# Altium PCB rota.PcbDoc
Units mil, origin at the board's own origin, x right, y up, seen from the top; angles counter-clockwise.
Board outline 6000 x 4000 mil, 2 copper layers (Top Layer, Bottom Layer); 10 components, 13 nets, 60 pads, 37 vias.
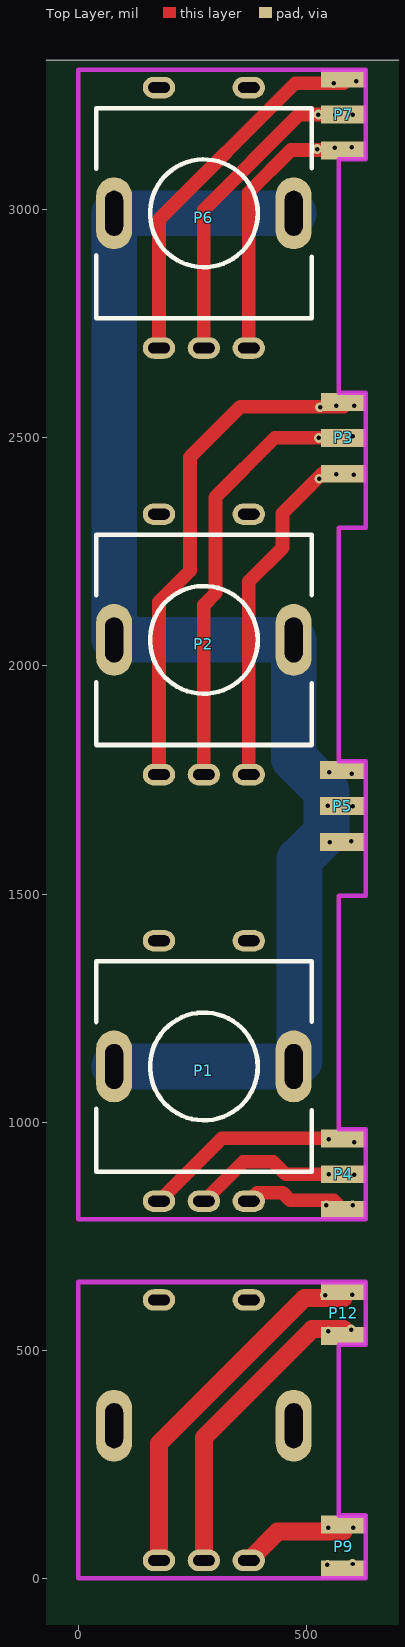
[diagram p0: Top Layer view]
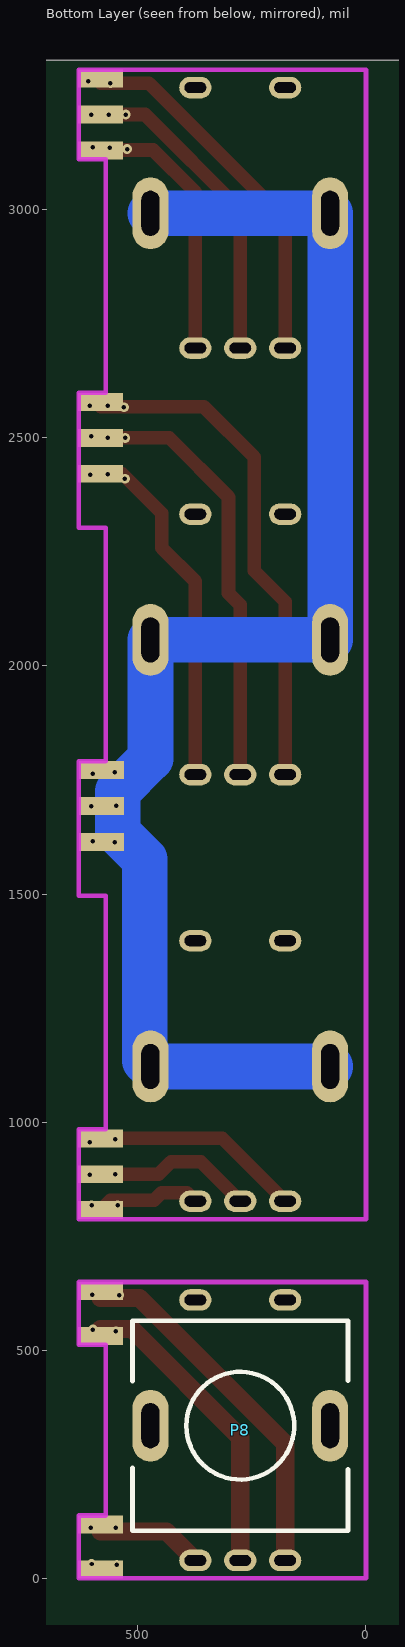
[diagram p1: Bottom Layer view, seen from below]

## Layer stack, top to bottom
Top Layer: signal copper 1.4
Dielectric: dielectric 12.6, FR-4, Dk 4.8
Bottom Layer: signal copper 1.4

## Board outline
-2135,-672.6 3865,-672.6 3865,3327.4 -2135,3327.4

## Design rules (kind name [scope] priority, off if disabled: settings)
Clearance [All] p1: gap=10
ComponentClearance [All] p1 off: gap=10 collisioncheckmode=3 verticalgap=10 showdistances=FALSE
Height [All] p1 off: minheight=0 maxheight=1000 prefheight=500
PolygonConnect [All] p1: connectstyle=Relief reliefconductorwidth=10 reliefentries=4 polygonreliefangle="90 Angle" airgapwidth=10
RoutingVias [All] p1: holewidth=9.84 width=21.65 viastyle="Through Hole" minholewidth=9.84 minwidth=21.65 maxholewidth=28 maxwidth=50
SolderMaskExpansion [All] p1: expansion=4
Width [All] p1: maxlimit=200 minlimit=10 preferedwidth=10 minimp=50.000000 maximp=50.000000 favimp=50.000000
26 further rules are at their usual default settings.

## Components (designator, comment, footprint, x,y, rotation, side; value= is the part's Value field where it differs from the comment)
P1 "ROTA" rotation_key 275.59,1122.05 r0 top locked
P2 "ROTA" rotation_key 275.59,2057.09 r0 top locked
P3 "Header 3" ROTA-3PIN 580.71,2500 r180 top
P4 "Header 3" ROTA-3PIN 580.71,885.83 r180 top
P5 "Header 3" ROTA-3PIN 580.71,1692.91 r0 top
P6 "ROTA" rotation_key 275.59,2992.13 r0 top locked
P7 "Header 3" ROTA-3PIN 580.71,3208.66 r180 top
P8 "ROTA" rotation_key 275.59,334.65 r180 bottom locked
P9 "Header 2" ROTA-2PIN 581.69,118.11 r0 top
P12 "Header 2" ROTA-2PIN 581.69,629.92 r0 top

## Footprints (in the part's own frame and the unit in brackets; to place one, negate y for a bottom-side part, rotate by r counter-clockwise, add the part's x,y. Pads: shape width x height; smd on the part's side, far side on the other; paste and mask are expansions set on the pad)
ROTA-2PIN [mm]
  rect 2.5x1 smd: 1(0,0) 2(0,-2.5)
  rect 2.5x1 smd far side: 1(0,0) 2(0,-2.5)
ROTA-3PIN [mm]
  rect 2.5x1 smd: 1(-0.025,2) 2(-0.025,0) 3(-0.025,-2)
  rect 2.5x1 smd far side: 1(-0.025,2) 2(-0.025,0) 3(-0.025,-2)
rotation_key [mm]
  oval 2x4 hole 1 slot 2.5 at 90 deg: 1(-5,0) 2(5,0)
  oval 1.8x1.2 hole 0.6 slot 1.2 at 0 deg: 3(-2.5,-7.5) 4(0,-7.5) 5(2.5,-7.5) 6(2.5,7) 7(-2.5,7)
  silkscreen extent -6,-5.85 6,5.85

## Part data
P1 P2 P6 P8: library part "Header 7", "Header, 7-Pin"
P3 P4 P5 P7: "Header, 3-Pin"
P9 P12: "Header, 2-Pin"

## Via types
v1: diameter 21.65, hole 9.84, Top Layer to Bottom Layer, 37 vias

## Nets (pads, with @x,y where several pads share a name; then routed paths per layer and width w, separated by ;. In a path a pad name is that pad's centre, name@x,y a point inside that pad or via, vN(x,y) a via of type N, cw(c..) or ccw(c..) an arc to the next point about the centre after c; other vN are vias at no path point)
GND: P1.1 P1.2 P2.1 P2.2 P5.1 P5.2 P5.3 P6.1 P6.2 | length 3110.7
  Bottom Layer w100: P1.1 P1.2 485.24,1134.84 485.24,1575.79 544.29,1634.84 544.29,1725.39 472.44,1797.24 P2.2 P2.1 P6.1 P6.2
  other v1: 551.18,1613.19 598.43,1616.14 547.24,1693.9 602.36,1692.91 599.41,1763.78 550.2,1766.73
NetP1_3: P1.3 P4.3 | length 461.6
  Top Layer w30: P1.3 314.96,964.57 P4.3@581.69,964.57
  other v1: 605.32,955.71 549.21,962.6
NetP1_4: P1.4 P4.2 | length 353.4
  Top Layer w30: P1.4 362.2,913.39 427.17,913.39 454.72,885.83 P4.2@581.69,885.83
  other v1: 605.32,884.84 549.21,885.83
NetP1_5: P1.5 P4.1 | length 231.3
  Top Layer w30: P1.5 392.72,845.47 447.83,845.47 464.57,828.74 560.04,828.74 P4.1@581.69,807.09
  other v1: 544.29,817.91 601.38,817.91
NetP2_3: P2.3 P3.3 | length 1106.5
  Top Layer w30: P2.3 177.17,2140.75 245.08,2208.66 245.08,2457.68 355.83,2568.43 P3.3@581.69,2568.43
  other v1: 530.51,2566.93 565.94,2569.88 605.32,2569.88
NetP2_4: P2.4 P3.2 | length 953.2
  Top Layer w30: P2.4 275.59,2133.86 301.18,2159.45 301.18,2370.08 431.1,2500 P3.2@581.69,2500
  other v1: 527.56,2500 565.94,2500 602.36,2502.95
NetP2_5: P2.5 P3.1 | length 773.1
  Top Layer w30: P2.5 374.02,2185.04 447.83,2258.86 447.83,2334.65 534.45,2421.26 P3.1@581.69,2421.26
  other v1: 528.54,2410.43 604.33,2419.29 565.94,2420.28
NetP6_3: P6.3 P7.3 | length 809.8
  Top Layer w30: P6.3 177.17,2978.35 475.91,3277.09 P7.3@581.69,3277.09
  other v1: 560.04,3277.56 609.25,3281.5
NetP6_4: P6.4 P7.2 | length 695.7
  Top Layer w30: P6.4 275.59,3000 484.25,3208.66 P7.2@581.69,3208.66
  other v1: 526.57,3208.66 563.98,3208.66 602.36,3208.66
NetP6_5: P6.5 P7.1 | length 555
  Top Layer w30: P6.5 374.02,3038.39 466.54,3130.91 P7.1@549.11,3130.91
  other v1: 523.62,3132.87 562.01,3135.83 599.41,3136.81
NetP8_3: P8.3 P9.1 | length 233.9
  Top Layer w40: P8.3 437.44,102.8 P9.1@581.69,102.8
  other v1: 548.23,111.22 603.35,111.22
NetP8_4: P8.4 P12.2 | length 674.3
  Top Layer w40: P8.4 275.59,309.06 513.35,546.81 P12.2@581.69,546.81
  other v1: 548.23,541.34 598.43,545.28
NetP8_5: P8.5 P12.1 | length 792.7
  Top Layer w40: P8.5 177.17,295.28 496.5,614.61 P12.1@581.69,614.61
  other v1: 541.34,621.06 600.39,622.05
pads on no net: P1.6 P1.7 P2.6 P2.7 P6.6 P6.7 P8.1 P8.2 P8.6 P8.7 P9.2
copper on no net:
  other v1: 546.26,29.53 601.38,31.5

## Keep-outs
Keep-Out Layer:
  lines w10: 0,0 629.92,0 629.92,137.8 570.87,137.8 570.87,511.81 629.92,511.81 629.92,649.61 0,649.61 0,0 ; 0,787.4 0,3307.09 629.92,3307.09 629.92,3110.24 570.87,3110.24 570.87,2598.43 629.92,2598.43 629.92,2303.15 570.87,2303.15 570.87,1791.34 629.92,1791.34 629.92,1496.06 570.87,1496.06 570.87,984.25 629.92,984.25 629.92,787.4 0,787.4